# EAGLE board HW2_Schematics (EAGLE 9.3.0)

Size 160 x 100 mm. Coordinates in mm from the lower left corner, seen from the top.
Outline: 0,0 160,0 160,100 0,100 0,0
Copper layers (1*16): Top 0.035mm / dielectric 1.5mm / Bottom 0.035mm
Design rules "default": minimum track width 6mil, minimum drill 0.35mm, track to track 6mil, track to pad 6mil, pad to pad 6mil, via to via 6mil, smd to smd 6mil, copper to edge 40mil, drill to drill 6mil, minimum pad ring 10mil, minimum via ring 8mil, stop-mask expansion 4mil, vias tented up to drill 0mil, thermal gap 10mil

## Footprints (pad centres in the part's own frame; a part is rotated, then mirrored left to right if it is on the bottom)
C025-025X050 = drill 0.813 octagon: 1 -1.27,0; 2 1.27,0
B45181B = drill 0.813: + -2.54,0 | drill 0.813 octagon: - 2.54,0
USB-MB-H = drill 0.8: D+ 5.1,0; D- 3.9,0.8; GND 5.1,-1.6; ID 3.9,-0.8; VBUS 5.1,1.6 | drill 1.9: P$6 0,-3.65; P$7 0,3.65
LED3MM = drill 0.813 octagon: A -1.27,0; K 1.27,0
0207/10 = drill 0.813 octagon: 1 -5.08,0; 2 5.08,0
TQFP44 = smd 1.5 x 0.5: 1 -5.8,4; 2 -5.8,3.2; 3 -5.8,2.4; 4 -5.8,1.6; 5 -5.8,0.8; 6 -5.8,0; 7 -5.8,-0.8; 8 -5.8,-1.6; 9 -5.8,-2.4; 10 -5.8,-3.2; 11 -5.8,-4; 23 5.8,-4; 24 5.8,-3.2; 25 5.8,-2.4; 26 5.8,-1.6; 27 5.8,-0.8; 28 5.8,0; 29 5.8,0.8; 30 5.8,1.6; 31 5.8,2.4; 32 5.8,3.2; 33 5.8,4 | smd 0.5 x 1.5: 12 -4,-5.8; 13 -3.2,-5.8; 14 -2.4,-5.8; 15 -1.6,-5.8; 16 -0.8,-5.8; 17 0,-5.8; 18 0.8,-5.8; 19 1.6,-5.8; 20 2.4,-5.8; 21 3.2,-5.8; 22 4,-5.8; 34 4,5.8; 35 3.2,5.8; 36 2.4,5.8; 37 1.6,5.8; 38 0.8,5.8; 39 0,5.8; 40 -0.8,5.8; 41 -1.6,5.8; 42 -2.4,5.8; 43 -3.2,5.8; 44 -4,5.8
SLIDE_SWITCH = drill 0.8: 1 -2,0; 2 0,0; 3 2,0 | drill 1: P$3 -4,0; P$4 4,0
TO92 = drill 0.813 octagon: 1 -1.27,0; 2 0,1.905; 3 1.27,0
PUSHBUTTON = drill 1.016 pad 1.88: 1 -2.54,0; 2 2.54,0
1X15 = drill 1.016 pad 1.88: 1 -15.24,0; 2 -12.7,0; 3 -10.16,0; 4 -7.62,0; 5 -5.08,0; 6 -2.54,0; 7 0,0; 8 2.54,0; 9 5.08,0; 10 7.62,0; 11 10.16,0; 12 12.7,0; 13 15.24,0; 14 17.78,0; 15 20.32,0
1X05 = drill 1.016 pad 1.88: 1 0,0; 2 2.54,0; 3 5.08,0; 4 7.62,0; 5 10.16,0
OSC = drill 1.016 pad 1.88: 1 -2.54,0; 2 0,0; 3 2.54,0

## Placement (x,y rotation side)
C1  0.1uF  [C025-025X050]  -41.91,46.99 0 top  (outside the outline)
C3  [C025-025X050]  -25.4,59.69 0 top  (outside the outline)
C4  0.1uF  [C025-025X050]  -48.26,46.99 0 top  (outside the outline)
C5  0.1uF  [C025-025X050]  -54.61,46.99 0 top  (outside the outline)
C6  10uF  [B45181B]  -21.59,45.72 0 top  (outside the outline)
C7  10uF  [B45181B]  -34.29,45.72 0 top  (outside the outline)
C8  0.1uF  [C025-025X050]  -16.51,54.61 0 top  (outside the outline)
J1  USB-MB-H  [USB-MB-H]  -48.26,6.35 0 top  (outside the outline)
LED1  RED  [LED3MM]  -31.75,71.12 0 top  (outside the outline)
LED2  GREEN  [LED3MM]  -21.59,71.12 0 top  (outside the outline)
R1  330  [0207/10]  -34.29,59.69 0 top  (outside the outline)
R2  330  [0207/10]  -46.99,59.69 0 top  (outside the outline)
R3  1ok  [0207/10]  -19.05,64.77 0 top  (outside the outline)
R4  10k  [0207/10]  -31.75,64.77 0 top  (outside the outline)
U$1  PIC32MX270F256D  [TQFP44]  -33.02,7.62 0 top  (outside the outline)
U$2  SLIDE_SWITCH  [SLIDE_SWITCH]  -31.75,20.32 0 top  (outside the outline)
U$3  MCP1702  [TO92]  -49.53,66.04 0 top  (outside the outline)
U$4  RESET  [PUSHBUTTON]  -41.91,53.34 0 top  (outside the outline)
U$5  USER  [PUSHBUTTON]  -53.34,53.34 0 top  (outside the outline)
U$6  CONN_015  [1X15]  -34.29,31.75 0 top  (outside the outline)
U$7  CONN_015  [1X15]  -34.29,39.37 0 top  (outside the outline)
U$8  PICKKIT  [1X05]  -31.75,54.61 0 top  (outside the outline)
U$9  8MHZ  [OSC]  -17.78,60.96 0 top  (outside the outline)

## Library data of the parts
C1 C3-C8 = rcl; SPICEPREFIX: C
J1 U$1-U$9 = Honghe_Qi_ME433_HW2_Library
LED1 LED2 = led
R1-R4 = rcl; SPICEPREFIX: R

## Nets
+3V3: C3.1 C5.1 C7.+ C8.1 LED1.A R3.2 R4.2 U$1.10 U$1.17 U$1.40 U$3.3 U$6.2 U$8.5
+5V: C4.1 U$1.42 U$2.3 U$3.2 U$7.2
A2: U$1.30 U$9.1
A3: U$1.31 U$9.3
D+: J1.D+ U$1.8
D-: J1.D- U$1.9
GND: C1.2 C3.2 C4.2 C5.2 C6.- C7.- C8.2 J1.GND R1.1 R2.1 U$1.6 U$1.16 U$1.29 U$1.39 U$3.1 U$4.2 U$5.2 U$6.1 U$7.1 U$8.1 U$9.2
ID: J1.ID U$1.41
MCLR: R3.1 U$1.18 U$4.1 U$8.2
N$1: J1.VBUS U$2.2
N$2: LED1.K R1.2
N$3: LED2.K R2.2
N$4: C6.+ U$1.7
N$5: C1.1 U$1.28
PGC: U$1.22 U$8.3
PGD: U$1.21 U$8.4
RA0: U$1.19 U$6.5
RA1: U$1.20 U$6.4
RA4/LED: LED2.A U$1.34 U$7.9
RA7: U$1.13 U$6.8
RA8: U$1.32 U$7.11
RA9: U$1.35 U$7.8
RA10: U$1.12 U$6.9
RB2: U$1.23 U$6.3
RB3: U$1.24 U$7.15
RB7: U$1.43 U$7.4
RB8: U$1.44 U$7.3
RB9: U$1.1 U$6.15
RB13: U$1.11 U$6.10
RB14: U$1.14 U$6.7
RB15: U$1.15 U$6.6
RC0: U$1.25 U$7.14
RC1: U$1.26 U$7.13
RC2: U$1.27 U$7.12
RC3: U$1.36 U$7.7
RC4: U$1.37 U$7.6
RC5: U$1.38 U$7.5
RC6: U$1.2 U$6.14
RC7: U$1.3 U$6.13
RC8: U$1.4 U$6.12
RC9: U$1.5 U$6.11
USER/RB4: R4.1 U$1.33 U$5.1 U$7.10

## Tracks (layer width: path | path; a pad name or v marks a point on that pad's centre or on a via)
+3V3  (12 unrouted)
+5V  (4 unrouted)
A2  (1 unrouted)
A3  (1 unrouted)
D+  (1 unrouted)
D-  (1 unrouted)
GND  (20 unrouted)
ID  (1 unrouted)
MCLR  (3 unrouted)
N$1  (1 unrouted)
N$2  (1 unrouted)
N$3  (1 unrouted)
N$4  (1 unrouted)
N$5  (1 unrouted)
PGC  (1 unrouted)
PGD  (1 unrouted)
RA0  (1 unrouted)
RA1  (1 unrouted)
RA4/LED  (2 unrouted)
RA7  (1 unrouted)
RA8  (1 unrouted)
RA9  (1 unrouted)
RA10  (1 unrouted)
RB2  (1 unrouted)
RB3  (1 unrouted)
RB7  (1 unrouted)
RB8  (1 unrouted)
RB9  (1 unrouted)
RB13  (1 unrouted)
RB14  (1 unrouted)
RB15  (1 unrouted)
RC0  (1 unrouted)
RC1  (1 unrouted)
RC2  (1 unrouted)
RC3  (1 unrouted)
RC4  (1 unrouted)
RC5  (1 unrouted)
RC6  (1 unrouted)
RC7  (1 unrouted)
RC8  (1 unrouted)
RC9  (1 unrouted)
USER/RB4  (3 unrouted)